# Altium PCB pcb.PcbDoc (part 1 of 6)
Units mm, origin at the board's own origin, x right, y up, seen from the top; angles counter-clockwise.
Board outline 85.44 x 182.72 mm, 2 copper layers (Top Layer, Bottom Layer); 68 components, 54 nets, 232 pads, 184 vias.
Unrouted connection lines stored in the file: 53.
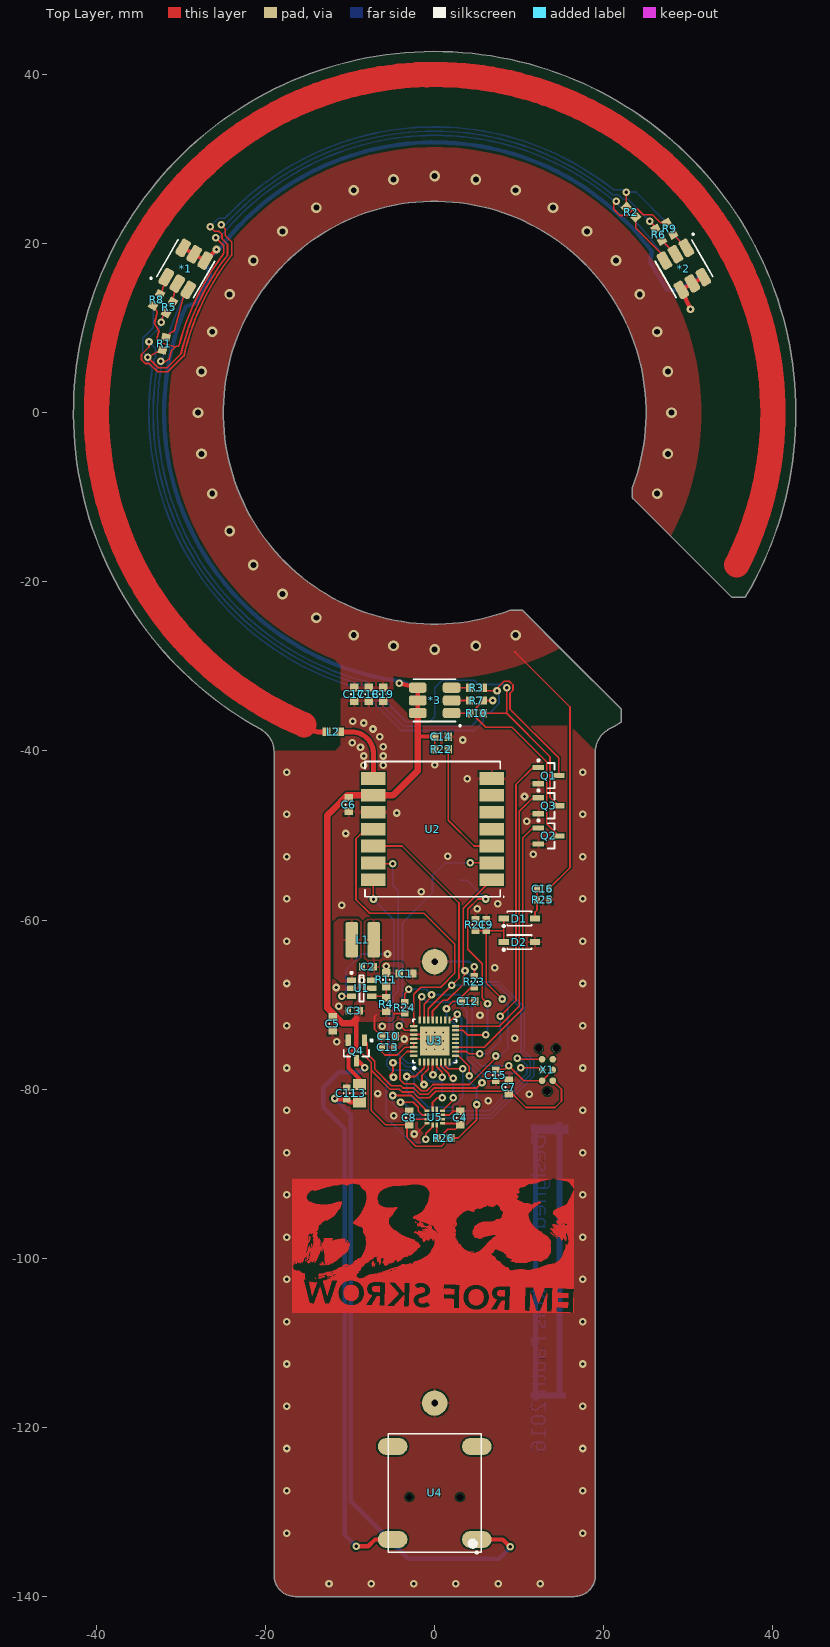
[diagram p0: Top Layer view]
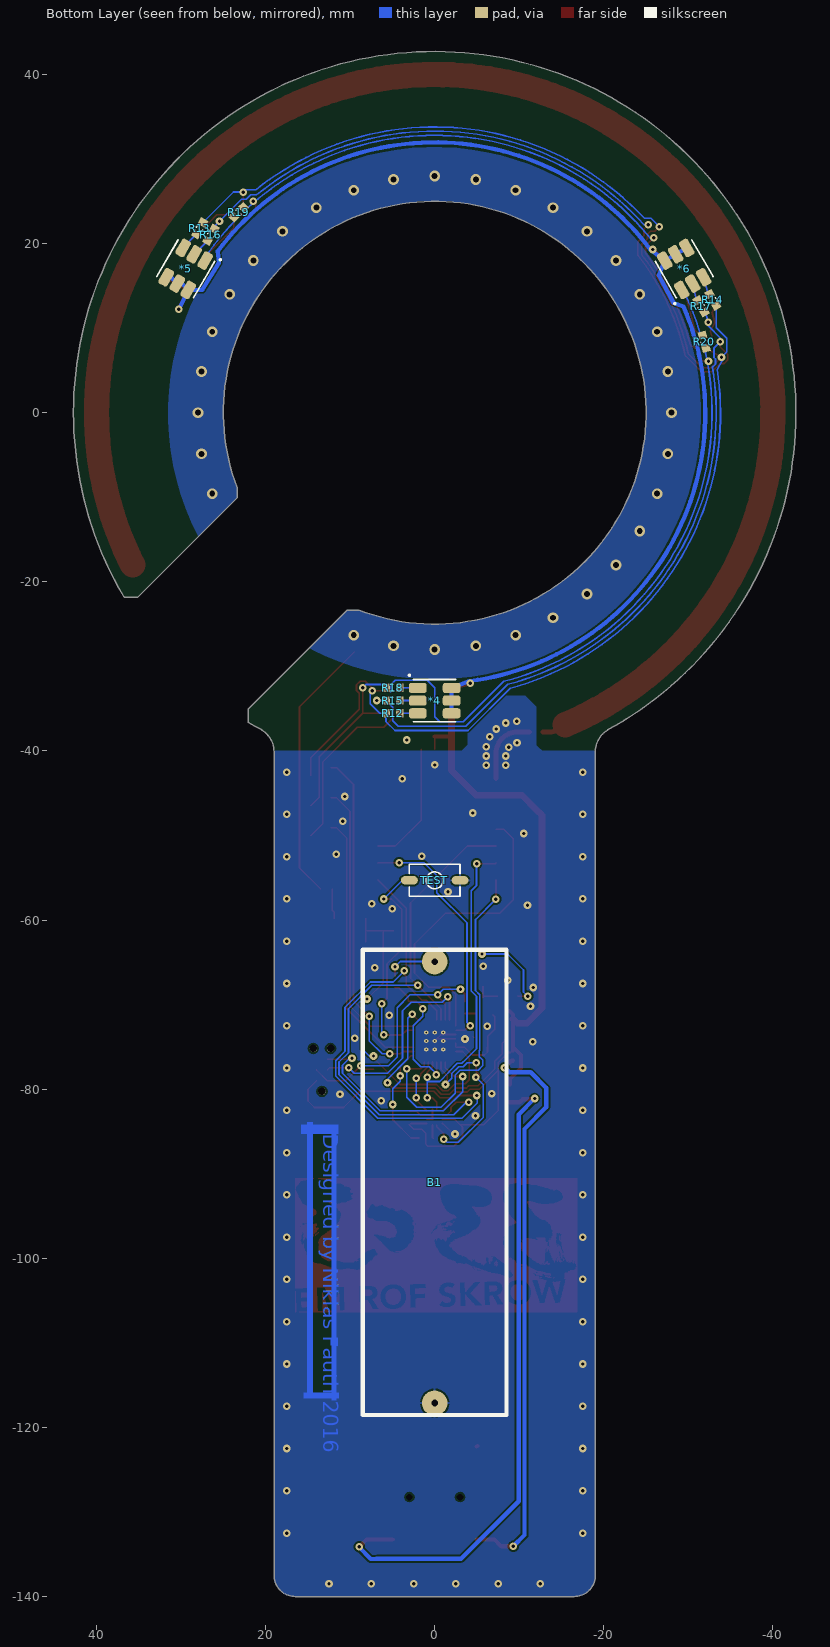
[diagram p1: Bottom Layer view, seen from below]

## Layer stack, top to bottom
Top Solder: solder mask 0.0102, Solder Resist, Dk 3.5
Top Layer: signal copper 0.0356
Dielectric 1: dielectric 0.32, FR-4, Dk 4.8
Bottom Layer: signal copper 0.0356
Bottom Solder: solder mask 0.0102, Solder Resist, Dk 3.5

## Board outline
-19,-137.5 -19,-40.1 ccw(c-22,-40.1) -20.457,-37.528 -20.447,-37.509 cw(c0,0) 36.799,-21.699 36.698,-21.8 35.1,-21.8 23.45,-10.15 23.375,-10.075 23.375,-8.866 ccw(c0,0) 8.941,-23.346 10.346,-23.346 15.5,-28.5 22.055,-35.055 22.055,-36.591 cw(c0,0) 20.448,-37.513 20.457,-37.528 ccw(c22,-40.1) 19,-40.1 19,-137.5 cw(c16.5,-137.5) 16.5,-140 -16.5,-140 cw(c-16.5,-137.5)

## Design rules (kind name [scope] priority, off if disabled: settings)
Clearance [All] p1: gap=0.2
PolygonConnect PolygonConnect_Via [All vs IsVia] p1: connectstyle=Direct reliefconductorwidth=0.3 reliefentries=4 polygonreliefangle="90 Angle" airgapwidth=0.2
PolygonConnect [All] p2: connectstyle=Relief reliefconductorwidth=0.3 reliefentries=4 polygonreliefangle="90 Angle" airgapwidth=0.2
RoutingVias [All] p1: holewidth=0.4 width=0.9 viastyle="Through Hole" minholewidth=0.3 minwidth=0.8 maxholewidth=1 maxwidth=1.27
SolderMaskExpansion [isVia] p1: expansion=0 soldermaskfromhole=TRUE
SolderMaskExpansion SolderMaskExpansion_1 [All] p2: expansion=0.102
Width [All] p1: maxlimit=3 minlimit=0.15 preferedwidth=0.2
30 further rules are at their usual default settings.

## Components (designator, comment, footprint, x,y, rotation, side; value= is the part's Value field where it differs from the comment)
*1 "RGB_LED_5050" plcc6 -29.445,17 r60 top
*2 "RGB_LED_5050" plcc6 29.467,17.012 r300 top
*3 "RGB_LED_5050" plcc6 0,-34.025 r180 top
*4 "RGB_LED_5050" plcc6 0,-34.05 r180 bottom
*5 "RGB_LED_5050" plcc6 29.445,17 r300 bottom
*6 "RGB_LED_5050" plcc6 -29.5,17 r60 bottom
B1 "AA" AA-HOLDER 0,-91.024 r90 bottom
C1 "100n 50V" C-0603-M -3.403,-66.32 r0 top
C2 "4u7 10V" C-0603-H -7.874,-65.532 r0 top
C3 "10u 6,3V" C-0603-H -9.525,-70.739 r0 top
C4 "100n 50V" C-0603-M 3,-83.4 r270 top
C5 "100n 50V" C-0603-M -12.065,-72.263 r90 top
C6 "100n 50V" C-0603-M -10.16,-46.355 r90 top
C7 "100n 50V" C-0603-M 8.763,-79.756 r270 top
C8 "100n 50V" C-0603-M -3,-83.4 r270 top
C9 "10n 50V" C-0603-H 6.096,-60.579 r270 top
C10 "100n 50V" C-0603-M -5.486,-73.736 r180 top
C11 "1u 10V" C-0603-H -10.4,-80.5 r270 top
C12 "100n 50V" C-0603-M 3.937,-69.596 r180 top
C13 "1u 10V" C-0603-H -5.537,-75.032 r180 top
C14 "100n 50V" C-0603-M 0.8,-38.3 r180 top
C15 "2.2n 50V" C-0603-H 7.239,-78.359 r90 top
C16 "10n 50V" C-0603-H 12.8,-56.3 r180 top
C17 "100p 25V" C-0603-M -9.5,-33.3 r90 top
C18 "100p 25V" C-0603-M -7.8,-33.3 r90 top
C19 "100p 25V" C-0603-M -6.1,-33.3 r90 top
D1 "BAT54T1G" SOD123 10.014,-59.817 r180 top
D2 "BZT52HC3V3WF" SOD123 10.014,-62.611 r180 top
L1 "4.7uH" SRN4012 -8.509,-62.334 r180 top
L2 "47nH" C-0603-M -12,-37.75 r180 top
L3 "10uH" R-0805 -8.9,-80.5 r90 top
Q1 "2N7002" INF-PG-SOT23_M 13.462,-42.926 r0 top
Q2 "2N7002" INF-PG-SOT23_M 13.462,-50.038 r0 top
Q3 "2N7002" INF-PG-SOT23_M 13.462,-46.482 r0 top
Q4 "2N7002" INF-PG-SOT23_M -9.271,-75.438 r270 top
R1 "220" R-0603-M -32.004,8.152 r255 top
R2 "220" R-0603-M 23.216,23.724 r135 top
R3 "220" R-0603-M 4.953,-32.512 r0 top
R4 "976k" R-0603-M -5.715,-69.977 r270 top
R5 "120" R-0603-M -31.369,12.446 r240 top
R6 "120" R-0603-M 26.492,21.031 r120 top
R7 "120" R-0603-M 4.953,-34.036 r0 top
R8 "47" R-0603-M -32.893,13.335 r240 top
R9 "47" R-0603-M 27.813,21.768 r120 top
R10 "47" R-0603-M 4.953,-35.56 r0 top
R11 "562k" R-0603-M -5.715,-67.056 r270 top
R12 "220" R-0603-M 4.953,-35.535 r0 bottom
R13 "220" R-0603-M 27.8,21.8 r120 bottom
R14 "220" R-0603-M -32.893,13.335 r240 bottom
R15 "120" R-0603-M 4.953,-34.036 r0 bottom
R16 "120" R-0603-M 26.467,21.031 r120 bottom
R17 "120" R-0603-M -31.496,12.573 r240 bottom
R18 "47" R-0603-M 4.953,-32.512 r0 bottom
R19 "47" R-0603-M 23.2,23.7 r135 bottom
R20 "47" R-0603-M -31.877,8.382 r255 bottom
R21 "2.2M" R-0603-H 4.826,-60.579 r270 top
R22 "10k" R-0603-M 0.8,-39.8 r180 top
R23 "4k7" R-0603-H 4.699,-67.31 r90 top
R24 "47k" R-0603-H -3.556,-70.358 r270 top
R25 "2.2M" R-0603-H 12.8,-57.6 r180 top
R26 "0" R-0603-M 1.067,-85.776 r180 top
TEST "TEST" switch-mini-ALPS 0,-55.3 r180 bottom (schematic designator SW1)
U1 "MCP1640" SOT23-6 -8.636,-68.072 r0 top
U2 "RADIO" RFM12 -0.25,-49.25 r180 top
U3 "MSP430G2553IRHB32R" RHB0032E_V 0,-74.295 r90 top
U4 "BUZZER" PIEZO 0,-127.75 r180 top
U5 "BMA280" LGA12C50P4X4_203X203X80 0,-83.3 r0 top
X1 "TC2050-IDC" TC2030-IDC-NL 13.335,-80.264 r90 top

## Footprints (in the part's own frame and the unit in brackets; to place one, negate y for a bottom-side part, rotate by r counter-clockwise, add the part's x,y. Pads: shape width x height; smd on the part's side, far side on the other; paste and mask are expansions set on the pad)
AA-HOLDER [mm]
  round 3 hole 0.8: 1(-26.1,0) 2(26.1,0)
  silkscreen extent -27.5,-8.5 27.5,8.5, body extent -28.29,-8.13 28.6,8.13, height 14.54
C-0603-H [mm] "Chip Resistor, Body 1.6x0.8mm, IPC High Density"
  rect 0.7x0.9 smd: 1(-0.7,0) 2(0.7,0)
  silkscreen extent -0.05,-0.35 0.05,0.35, body extent -0.85,-0.45 0.85,0.45, height 0.9
C-0603-M [mm] "Chip Resistor, Body 1.6x0.8mm, IPC Medium Density"
  rect 0.9x1 smd: 1(-0.8,0) 2(0.8,0)
  silkscreen extent -0.05,-0.4 0.05,0.4, body extent -0.85,-0.45 0.85,0.45, height 0.9
INF-PG-SOT23_M [mm] "SOT23, 3-Leads, Body 2.9x1.3mm, Pitch 0.95mm, IPC Low Density"
  rect 1.35x0.6 smd: 1(-1.2,0.95) 2(-1.2,-0.95) 3(1.2,0)
  silkscreen extent -1.32,-1.5 0.7,1.92, body extent -0.7,-1.5 0.7,1.5, height 1.1
LGA12C50P4X4_203X203X80 [mm] "LGA, 12-Leads, Body 2,03x2,03mmx0,80mm, Pitch 0,50mm"
  rect 0.6x0.29 smd: 1(-0.925,0.75) 2(-0.925,0.25) 3(-0.925,-0.25) 4(-0.925,-0.75) 7(0.925,-0.75) 8(0.925,-0.25) 9(0.925,0.25) 10(0.925,0.75)
  rect 0.29x0.6 smd: 5(-0.25,-0.925) 6(0.25,-0.925) 11(0.25,0.925) 12(-0.25,0.925)
  body extent -1.03,-1.03 1.03,1.03, height 0.8
PIEZO [mm] "SOJ, 4-Leads, Body 14,00x11,00mm, Pitch 11,00mm, IPC Low Density"
  round 0 hole 0.8: 0(-3,0.5) 1(3,0.5)
  oval 3.5x2 smd: 1(-4.975,5.5) 2(-4.975,-5.5) 3(4.975,-5.5) 4(4.975,5.5)
  silkscreen extent -5.5,-7 5.5,7.17, body extent -5.5,-7 5.5,7, height 3.2
plcc6 [mm]
  rrect50% 2.1x1.2 smd: 1(-2,1.5) 2(-2,0) 3(-2,-1.5) 4(2,-1.5) 5(2,0) 6(2,1.5)
  silkscreen extent -3.1,-2.5 2.5,3.1, body extent -2.6,-2.48 2.6,2.53, height 1.6
R-0603-H [mm] "Chip Resistor, Body 1.6x0.8mm, IPC High Density"
  rect 0.7x0.9 smd: 1(-0.7,0) 2(0.7,0)
  silkscreen extent -0.05,-0.35 0.05,0.35, body extent -0.87,-0.47 0.88,0.48, height 0.55
R-0603-M [mm] "Chip Resistor, Body 1.6x0.8mm, IPC Medium Density"
  rect 0.9x1 smd: 1(-0.8,0) 2(0.8,0)
  silkscreen extent -0.05,-0.4 0.05,0.4, body extent -0.87,-0.47 0.88,0.48, height 0.55
R-0805 [mm] "Chip Resistor, Body 2.0x1.3mm, IPC Low Density"
  rect 1.25x1.5 smd: 1(-1.05,0) 2(1.05,0)
  silkscreen extent -0.05,-0.65 0.05,0.65, body extent -1.1,-0.67 1.1,0.68, height 0.7
RFM12 [mm] "Radio Module"
  rect 2.9x1.5 smd: 1(-7,6) 2(-7,4) 3(-7,2) 4(-7,0) 5(-7,-2) 6(-7,-4) 7(-7,-6) 8(7,-6) 9(7,-4) 10(7,-2) 11(7,0) 12(7,2) 13(7,4) 14(7,6)
  silkscreen extent -8.45,-8 8,8.05, body extent -8,-8.1 8,8.1, height 4.1
RHB0032E_V [mm] "QFN, 32-Leads, Body 5x5mm, Pitch 0.5mm, Thermal Pad 3.45x3.45mm"
  rrect36% 0.85x0.28 smd: 1(-2.475,1.75) 2(-2.475,1.25) 3(-2.475,0.75) 4(-2.475,0.25) 5(-2.475,-0.25) 6(-2.475,-0.75) 7(-2.475,-1.25) 8(-2.475,-1.75) 17(2.475,-1.75) 18(2.475,-1.25) 19(2.475,-0.75) 20(2.475,-0.25) 21(2.475,0.25) 22(2.475,0.75) 23(2.475,1.25) 24(2.475,1.75)
  rrect36% 0.28x0.85 smd: 9(-1.75,-2.475) 10(-1.25,-2.475) 11(-0.75,-2.475) 12(-0.25,-2.475) 13(0.25,-2.475) 14(0.75,-2.475) 15(1.25,-2.475) 16(1.75,-2.475) 25(1.75,2.475) 26(1.25,2.475) 27(0.75,2.475) 28(0.25,2.475) 29(-0.25,2.475) 30(-0.75,2.475) 31(-1.25,2.475) 32(-1.75,2.475)
  rrect3% 3.45x3.45 smd: 33(0,0)
  silkscreen extent -3.35,-2.58 2.58,2.57, body extent -2.5,-2.5 2.5,2.5, height 1
SOD123 [mm]
  rect 1.2x0.7 smd: 1(-1.85,0) 2(1.85,0)
  silkscreen extent -1.43,-0.85 1.97,1.02, body extent -1.93,-0.85 1.93,0.85, height 1.42
SOT23-6 [mm] "SOT23, 6-Leads, Body 2.9x1.6mm, Pitch 0.95mm, Lead Span 2.8mm, IPC Medium Density"
  rect 1.1x0.65 smd: 1(-1.2,0.95) 2(-1.2,0) 3(-1.2,-0.95) 4(1.2,-0.95) 5(1.2,0) 6(1.2,0.95)
  silkscreen extent -1.32,-1.55 0.25,1.95, body extent -1.4,-1.45 1.4,1.45, height 1.45
SRN4012 [mm]
  rrect30% 1.5x4.2 smd: 1(-1.3,0) 2(1.3,0)
  body extent -2.15,-2.15 2.15,2.15, height 3
switch-mini-ALPS [mm]
  oval 2x1 smd paste-2: 1(-3,0) 2(3,0)
  silkscreen extent -3,-1.9 3,1.9, body extent -3.4,-1.85 3.4,1.85, height 2.5
TC2030-IDC-NL [mil]
  round 31 smd paste-30.98: 1(50,-25) 2(50,25) 3(100,-25) 4(100,25) 5(150,-25) 6(150,25)
  round 34 hole 35 unplated: A(0,0) B(200,40) C(200,-40)

## Part data
B1: library part AA-Batt-Holder, "Batt Holder AA"
C1 C4 C5 C6 C7 C8 C10 C12 C14: library part C-0603-100n-50V, "Capacitor 100n 50V"
C2: library part C-0603-4u7-10V, "Capacitor 4.7uF 10V"
C3: library part C-0603-10u-6,3V, "Capacitor 10uF 6,3V"
C9 C16: library part C-0603-10n-50V, "Capacitor 10nF 50V"
C11 C13: library part C-0603-1u-10V, "Capacitor 1uF 10V"
C15: library part C-0603-2n2-50V, "Capacitor 2.2n 50V"
C17 C18 C19: library part C-0603-100p-25V, "Capacitor 100pF 25V"
D2: library part BAT54T1G, "BAT54T1G"
L1: library part L-SRN4012TA-4R7M, "SRN4012TA-4R7M"
L2: library part L-0603-47nH
L3: library part L-0805-10uH, "L 0805 10uH"
Q1 Q2 Q3 Q4: library part CMP-1149-00026-1, "N-Channel OptiMOS Small-Signal-Transistor, 60 V VDS, 0.3 A ID, -55 to 150 degC, PG-SOT23, Reel, Green"
R1 R2 R3 R12 R13 R14: library part R-0603-220, "Resistor 220"
R4: library part R-0603-976k, "Resistor 976k"
R5 R6 R7 R15 R16 R17: library part R-0603-120, "Resistor 120"
R8 R9 R10 R18 R19 R20: library part R-0603-47, "Resistor 47"
R11: library part R-0603-562k, "Resistor 562k"
R21 R25: library part R-0603-2M2, "Resistor 2.2M"
R22: library part R-0603-10k, "Resistor 10k"
R23: library part R-0603-4k7, "Resistor 4k7"
R24: library part R-0603-47k, "Resistor 4k7"
R26: library part R-0603-0, "Resistor 0"
TEST: library part Switch-mini-ALPS, "SKQYAAE010"
U1: "aaa to 3.3V"
U2: library part RFM12, "Sub 1GHz Radio Module"
U3: library part CMP-0365-01202-2, "16 MHz Mixed Signal Microcontroller with 16 KB Flash, 512 B SRAM and 24 GPIOs, -40 to 85 degC, 32-pin QFN (RHB), Green (RoHS & no Sb/Br)"
U4: library part PIEZO-1411A03
X1: library part TAG-Connect-SWD, "TC2050-IDC SWD"

## Via types
v1: diameter 0.9, hole 0.4, Top Layer to Bottom Layer, 143 vias
v2: diameter 1.27, hole 0.7, Top Layer to Bottom Layer, 32 vias
v3: diameter 0.5, hole 0.2, Top Layer to Bottom Layer, 9 vias

## Nets (pads, with @x,y where several pads share a name; then routed paths per layer and width w, separated by ;. In a path a pad name is that pad's centre, name@x,y a point inside that pad or via, vN(x,y) a via of type N, cw(c..) or ccw(c..) an arc to the next point about the centre after c; other vN are vias at no path point)
ANT: L2.2 | length 194.2
  Top Layer w0.6: -15.456,-36.893 -15.343,-37.006 ccw(c-13.547,-35.21) -13.547,-37.75 L2.2@-12.8,-37.75
  Top Layer w3: -15.456,-36.893 cw(c0,0) 35.722,-17.999
BAT: C12.2 R23.1 U3.4 | length 16.4
  Top Layer w0.2: U3.4@-0.25,-76.77 -0.25,-78.25 v1(-0.2,-78.3) ; v1(1.397,-70.485) 1.397,-70.358 2.159,-69.596 C12.2@3.137,-69.596 3.137,-69.126 4.253,-68.01 R23.1@4.699,-68.01
  Bottom Layer w0.2: v1(-0.2,-78.3) -0.322,-78.3 0.635,-77.343 1.651,-77.343 2.54,-76.454 2.54,-72.517 1.397,-71.374 v1(1.397,-70.485)
BUZZ: Q4.1 U3.17 | length 28.9
  Top Layer w0.2: Q4.1@-8.321,-74.238 -7.971,-74.588 -7.971,-75.817 -7.105,-76.683 -7.105,-77.615 -5.123,-79.597 -4.013,-79.597 -3.752,-79.858 -2.49,-79.858 -1.746,-80.601 -0.794,-80.601 -0.042,-79.85 4.986,-79.85 v1(5.588,-79.248) ; U3.17@1.75,-71.82 1.967,-71.82 v1(2.667,-71.12)
  Bottom Layer w0.2: v1(2.667,-71.12) 3.175,-71.628 3.175,-76.409 5.588,-78.822 v1(5.588,-79.248)
COMP: C9.2 D1.2 D2.2 R21.2 U3.31 | length 41.1
  Top Layer w0.2: U3.31@-2.475,-75.545 -3.282,-75.545 -4.1,-76.363 -4.1,-78.876 -3.601,-79.375 -2.407,-79.375 -1.581,-80.201 -0.959,-80.201 -0.208,-79.45 4.11,-79.45 7.239,-76.321 v1(7.239,-76.073) ; R21.2@4.826,-61.279 C9.2@6.096,-61.279 ; v1(8.001,-69.342) 6.096,-67.437 C9.2@6.096,-61.279 ; D2.2@8.164,-62.611 8.164,-61.341 ; D1.2@8.164,-59.817 8.164,-61.341 ; C9.2@6.096,-61.279 8.102,-61.279 8.164,-61.341
  Bottom Layer w0.2: v1(7.239,-76.073) 7.747,-76.073 8.636,-75.184 8.636,-69.977 v1(8.001,-69.342)
CS1: U2.14 U3.7 | length 42.2
  Top Layer w0.2: U2.14@-7.25,-55.25 -7.25,-57.52 v1(-7.239,-57.531) ; U3.7@1.25,-76.77 1.25,-77.23 1.62,-77.6 3.299,-77.6 v1(3.302,-77.597)
  Bottom Layer w0.2: v1(-7.239,-57.531) -4.826,-59.944 -4.826,-68.326 -5.341,-68.841 -5.341,-75.387 -5.283,-75.445 -5.283,-76.155 -5.678,-76.55 -5.678,-77.203 -5.13,-77.75 -2.989,-77.75 -2.425,-78.314 -2.425,-80.475 -0.75,-82.15 2.111,-82.15 3.302,-80.959 v1(3.302,-77.597)
CS2: U3.6 U5.10 | length 7
  Top Layer w0.2: U3.6@0.75,-76.77 0.75,-77.295 1.65,-78.195 1.65,-78.339 2.011,-78.7 v1(2.2,-78.7) ; U5.10@0.925,-82.55 2.2,-81.275 v1(2.2,-81)
  Bottom Layer w0.2: v1(2.2,-81) v1(2.2,-78.7)
GND: B1.1 C1.1 C2.1 C3.1 C4.1 C5.1 C6.1 C7.1 C8.1 C9.1 C10.1 C11.1 C12.1 C13.1 C14.1 C15.1 C17.1 C18.1 C19.1 D2.1 Q1.2 Q2.2 Q3.2 Q4.2 R11.1 R21.1 R25.1 TEST.2 U1.2 U2.7 U2.10 U3.27 U3.28 U3.33 U5.4 U5.8 U5.9 U5.11 X1.5 | length 13131.2